# EAGLE board MainBoard 1.5.0 (EAGLE 9.6.2)
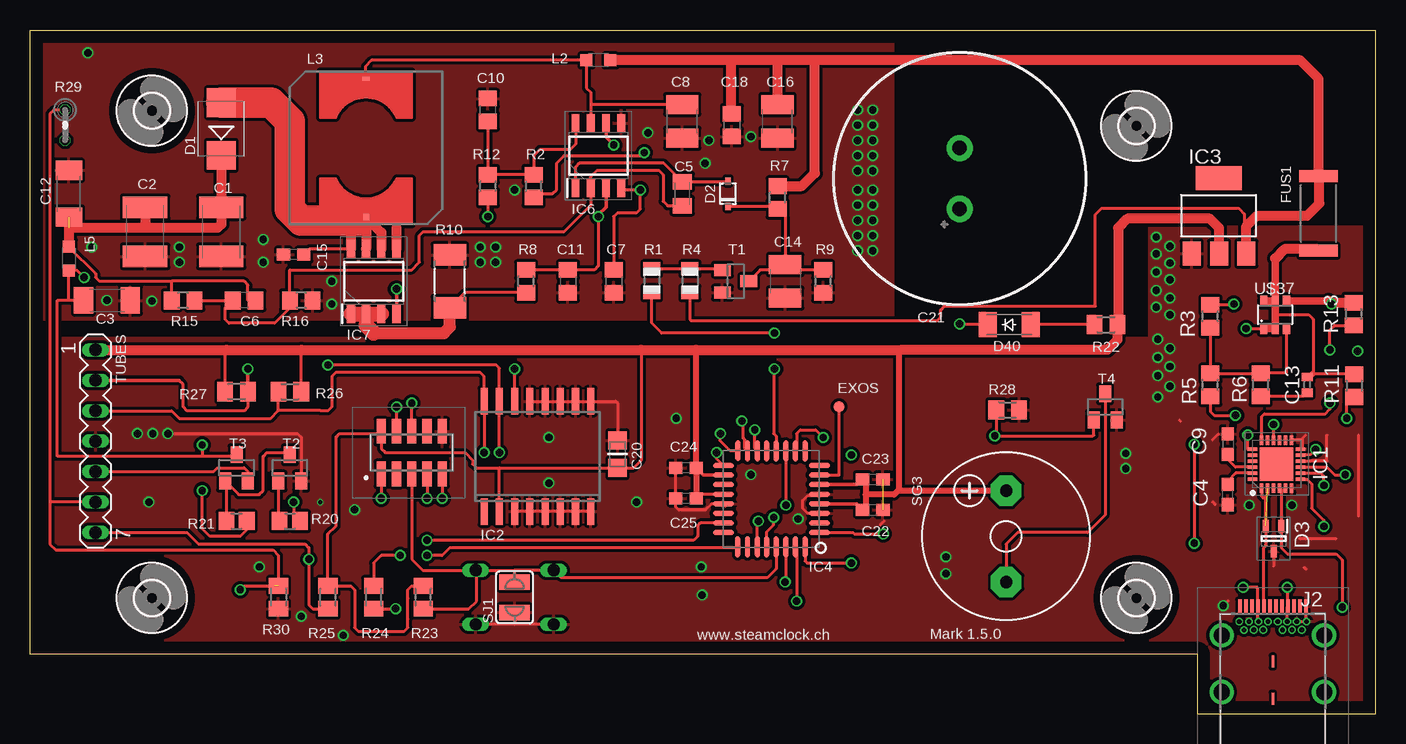
[diagram p0: board, top side]
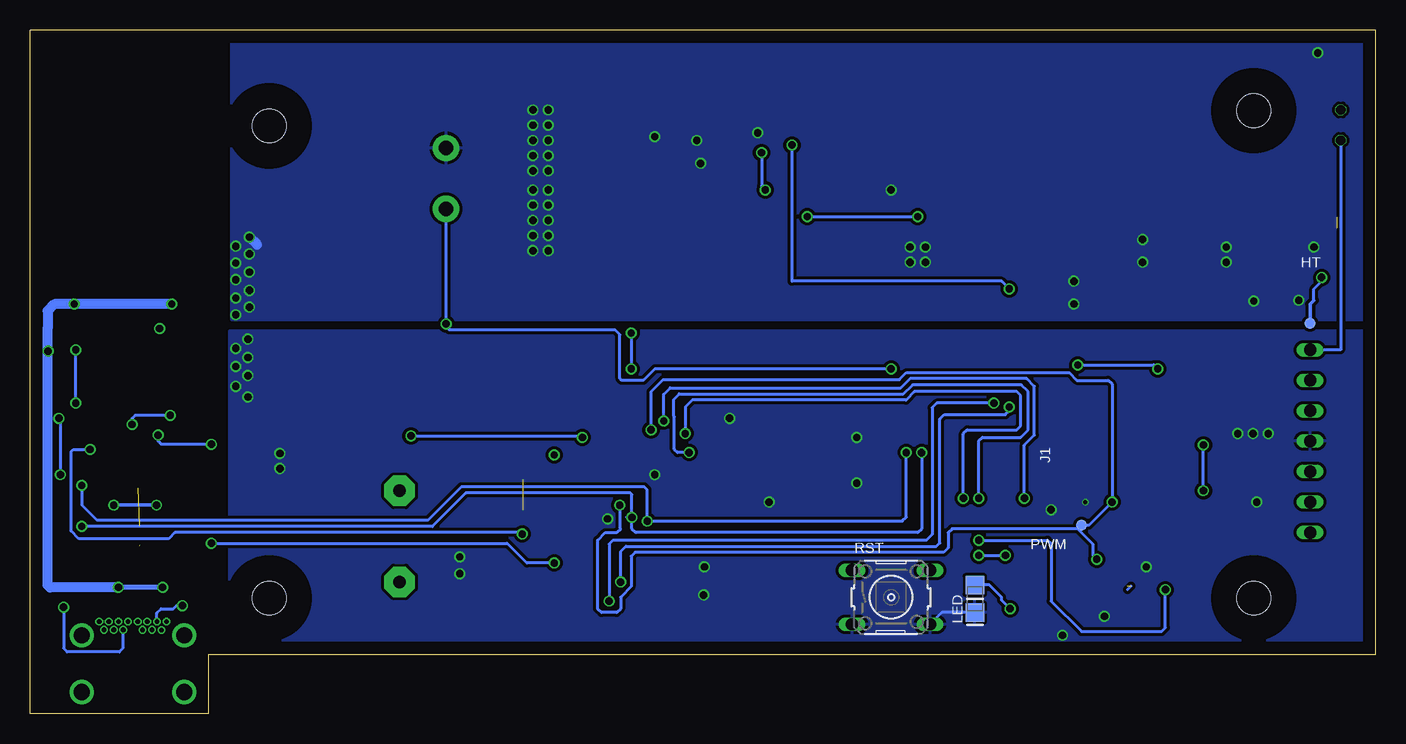
[diagram p1: board, bottom side, seen from below]

Size 112.14 x 57.02 mm. Coordinates in mm from the lower left corner, seen from the top.
Outline: 0,57.02 112.14,57.02 112.14,0 97.28,0 97.28,4.95 0,4.95 0,57.02
Copper layers (1*16): Top 0.035mm / dielectric 1.5mm / Bottom 0.035mm
Design rules "default *": minimum track width 10mil, minimum drill 24mil, track to track 8mil, track to pad 8mil, pad to pad 8mil, via to via 8mil, smd to smd 8mil, copper to edge 40mil, drill to drill 8mil, minimum pad ring 1mil, minimum via ring 3mil, stop-mask expansion 4mil, vias tented up to drill 0mil, thermal gap 10mil
Net classes: 0 default: width 0.254 mm, clearance 0.254 mm; 1 pwr: width 0.254 mm, clearance 0.356 mm

## Footprints (pad centres in the part's own frame; a part is rotated, then mirrored left to right if it is on the bottom)
C1812K = smd 1.8 x 3.7: 1 -2.05,0; 2 2.05,0
C1808 = smd 1.6 x 2.2: 1 -1.95,0; 2 1.95,0
C0603 = smd 1.1 x 1: 1 -0.85,0; 2 0.85,0
C0805K = smd 1.3 x 1.6: 1 -1,0; 2 1,0
C0805 = smd 1.3 x 1.5: 1 -0.95,0; 2 0.95,0
C1210 = smd 1.6 x 2.7: 1 -1.4,0; 2 1.4,0
C0402 = smd 0.7 x 0.9: 1 -0.65,0; 2 0.65,0
CAP0805-NP = smd 1.524 x 1.524: 1 0,0; 2 2.286,0
ELNA21.5X8.0 = drill 1.2 pad 2.184: + -2.54,0; - 2.54,0
SMB = smd 2.4 x 2.4: A 2.2,0; C -2.2,0
SOD323 = smd 0.6 x 0.45: A 1.06,0; C -1.06,0
SOT65P210X110-3N = smd 1.05 x 0.5: 1 -1.05,0.65; 2 -1.05,-0.65; 3 1.05,0
SOD-123_MINI-SMA = smd 1.5 x 2.1: A 1.8,0; C -1.8,0
TP09R = smd 0.9 x 0.9: TP 0,0
R6332 = smd 1 x 3.2: 1 -3.1,0; 2 3.1,0
2,8 = hole 2.8: 0,0
QFN50P400X400X100-25N = smd 0.8 x 0.3: 1 -2,1.25; 2 -2,0.75; 3 -2,0.25; 4 -2,-0.25; 5 -2,-0.75; 6 -2,-1.25; 13 2,-1.25; 14 2,-0.75; 15 2,-0.25; 16 2,0.25; 17 2,0.75; 18 2,1.25 | smd 0.3 x 0.8: 7 -1.25,-2; 8 -0.75,-2; 9 -0.25,-2; 10 0.25,-2; 11 0.75,-2; 12 1.25,-2; 19 1.25,2; 20 0.75,2; 21 0.25,2; 22 -0.25,2; 23 -0.75,2; 24 -1.25,2 | smd 2.8 x 2.8: 25 0,0
SO16W = smd 0.6 x 2.2: 1 -4.445,-4.6; 2 -3.175,-4.6; 3 -1.905,-4.6; 4 -0.635,-4.6; 5 0.635,-4.6; 6 1.905,-4.6; 7 3.175,-4.6; 8 4.445,-4.6; 9 4.445,4.6; 10 3.175,4.6; 11 1.905,4.6; 12 0.635,4.6; 13 -0.635,4.6; 14 -1.905,4.6; 15 -3.175,4.6; 16 -4.445,4.6
SOT223 = smd 1.499 x 2.007: 1 -2.261,-3.15; 2 0.025,-3.15; 3 2.311,-3.15 | smd 3.81 x 2.007: 4 0,3.15
QFP032 = smd 0.432 x 1.778: 1 0,0; 2 0.8,0; 3 1.599,0; 4 2.399,0; 5 3.199,0; 6 3.998,0; 7 4.798,0; 8 5.598,0; 17 5.588,8.001; 18 4.798,7.997; 19 3.998,7.997; 20 3.199,7.997; 21 2.399,7.997; 22 1.599,7.997; 23 0.799,7.997; 24 0,7.997 | smd 1.778 x 0.432: 9 6.807,1.194; 10 6.807,2.007; 11 6.807,2.794; 12 6.807,3.607; 13 6.807,4.394; 14 6.807,5.182; 15 6.807,5.994; 16 6.816,6.803; 25 -1.194,6.807; 26 -1.194,5.994; 27 -1.194,5.182; 28 -1.194,4.394; 29 -1.194,3.607; 30 -1.194,2.794; 31 -1.194,2.007; 32 -1.194,1.194
SOIC127P600X175-8N = smd 1.525 x 0.65: 1 -2.712,1.905; 2 -2.712,0.635; 3 -2.712,-0.635; 4 -2.712,-1.905; 5 2.712,-1.905; 6 2.712,-0.635; 7 2.712,0.635; 8 2.712,1.905
SOIC127P600X175-8N' = smd 1.525 x 0.7: 1 -2.712,1.905; 2 -2.712,0.635; 3 -2.712,-0.635; 4 -2.712,-1.905; 5 2.712,-1.905; 6 2.712,-0.635; 7 2.712,0.635; 8 2.712,1.905
2002132100010C4LF = smd 0.76 x 2.05: 1 2.54,1.775; 2 2.54,-1.775; 3 1.27,1.775; 4 1.27,-1.775; 5 0,1.775; 6 0,-1.775; 7 -1.27,1.775; 8 -1.27,-1.775; 9 -2.54,1.775; 10 -2.54,-1.775
632723300011 = drill 0.4 pad 0.65: 1 2,4.645; B1 2.8,4.645; B2 2.4,3.945; B3 1.6,3.945; B4 1.2,4.645; B5 0.8,3.945; B6 0.4,4.645; B7 -0.4,4.645; B8 -0.8,3.945; B10 -1.6,3.945 | drill 0.381 pad 0.635: 2 -2,4.645; B9 -1.2,4.645; B11 -2.4,3.945 | drill 1.342 pad 2.012: 3 4.27,3.495; 4 -4.27,3.495; 5 4.27,-1.235; 6 -4.27,-1.235 | smd 0.2 x 1: 7 0,1.315; 8 0,-1.785 | smd 0.3 x 1.2: A1 -2.75,5.895; A2 -2.25,5.895; A3 -1.75,5.895; A4 -1.25,5.895; A5 -0.75,5.895; A6 -0.25,5.895; A7 0.25,5.895; A8 0.75,5.895; A9 1.25,5.895; A10 1.75,5.895; A11 2.25,5.895; A12 2.75,5.895 | drill 0.381 pad 0.61: B12 -2.8,4.645
L2012C = smd 1 x 1: 1 -1,0; 2 1,0
MSS7341 = smd 0.61 x 0.305: 1 0,5.765 | smd 0.5 x 0.5: 2 0,-5.765
LED0805 = smd 1.524 x 1.524: 1 0,0; 2 2.286,0
R0805 = smd 1.1 x 1.4: 1 -1,0; 2 1,0
R0805' = smd 1.3 x 1.5: 1 -0.95,0; 2 0.95,0
R2010 = smd 1.8 x 2.7: 1 -2.2,0; 2 2.2,0
R2012 = smd 1.3 x 1.5: 1 -0.85,0; 2 0.85,0
M2012 = smd 1.3 x 1.6: 1 -0.95,0; 2 0.95,0
0204V = drill 0.813 octagon: 1 -1.27,0; 2 1.27,0
B3F-10XX = drill 1.016 long: 1 -3.251,2.261; 2 3.251,2.261; 3 -3.251,-2.261; 4 3.251,-2.261
F/CM12P = drill 1.016 pad 2.54 octagon: + 3.81,0; - -3.81,0
SJW = smd 1.27 x 2.54: 1 -1.27,0; 2 1.27,0
SOT23 = smd 1 x 1.4: 1 -0.95,-1.1; 2 0.95,-1.1; 3 0,1.1
MA07-1 = drill 1.016 long: 1 -7.62,0; 2 -5.08,0; 3 -2.54,0; 4 0,0; 5 2.54,0; 6 5.08,0; 7 7.62,0
SOT23-6 = smd 0.6 x 0.9: 1 -0.95,-1.15; 2 0,-1.15; 3 0.95,-1.15; 4 0.95,1.15; 5 0,1.15; 6 -0.95,1.15

## Placement (x,y rotation side)
C1  1uF  [C1812K]  15.94,40.2 270 top
C2  1uF  [C1812K]  9.59,40.2 270 top
C3  0.1uF  [C1808]  6.41,34.48 0 top
C4  1uF  [C0603]  99.82,18.29 90 top
C5  220pF  [C0805K]  54.36,43.37 270 top
C6  100pF  [C0805]  17.84,34.48 180 top
C7  430pF  [C0805]  48.64,36.07 270 top
C8  100uF  [C1210]  54.36,49.4 90 top
C9  1uF  [C0603]  99.82,22.48 270 top
C10  100nF  [C0805]  38.16,50.36 90 top
C11  1nF  [C0805]  44.83,36.07 270 top
C12  0.1uF  [C1808]  3.24,43.37 90 top
C13  [C0402]  106.43,27.43 90 top
C14  47uF  [C1210]  62.93,36.07 270 top
C15  560pF/250V  [C0603]  21.97,38.29 180 top
C16  100uF  [C1210]  62.29,49.4 90 top
C18  0.1uF  [C0805]  58.48,49.09 270 top
C20  0.1uF  [CAP0805-NP]  48.96,20.51 90 top
C21  [ELNA21.5X8.0]  77.47,44.64 90 top
C22  100n  [C0603]  70.23,17.02 0 top
C23  100nF  [C0603]  70.23,19.56 0 top
C24  100nF  [C0603]  54.67,20.51 180 top
C25  100nF  [C0603]  54.67,17.97 180 top
D1  ES1D  [SMB]  15.94,48.77 90 top
D2  BAT54  [SOD323]  58.17,43.37 90 top
D3  ESDA25W  [SOT65P210X110-3N]  103.63,14.6 270 top
D40  CGRM4001-G  [SOD-123_MINI-SMA]  81.6,32.45 0 top
EXOS  PTR1TP09R  [TP09R]  67.44,25.59 0 top
FUS1  [R6332]  107.38,41.72 90 top
H3  MOUNT-HOLE2.8  [2,8]  10.16,50.29 0 top
H4  MOUNT-HOLE2.8  [2,8]  10.16,9.65 0 top
H5  MOUNT-HOLE2.8  [2,8]  92.2,9.65 0 top
H6  MOUNT-HOLE2.8  [2,8]  92.2,49.02 0 top
HT  PTR1TP09R  [TP09R]  5.46,32.58 0 bottom
IC1  STUSB4500QTR  [QFN50P400X400X100-25N]  103.89,20.83 90 top
IC2  DS3231/SO  [SO16W]  42.29,21.46 0 top
IC3  REG1117  [SOT223]  99.06,41.53 0 top
IC4  ATMEGA328  [QFP032]  65.79,15.11 90 top
IC6  UCC3803DTR  [SOIC127P600X175-8N]  47.37,46.55 90 top
IC7  FDS2672  [SOIC127P600X175-8N']  28.64,36.07 90 top
J1  20021321-00010C4LF  [2002132100010C4LF]  31.81,21.78 180 top
J2  632723300011  [632723300011]  103.57,3.05 0 top
L2  60 Ohms @ 100MHz  [L2012C]  47.37,54.48 180 top
L3  33uH  [MSS7341]  28,47.18 0 top
L5  Ferrite  [L2012C]  3.24,37.97 270 top
LED  Blue  [LED0805]  33.4,8.45 90 bottom
PWM  PTR1TP09R  [TP09R]  24.51,15.75 0 bottom
R1  100k  [R0805]  51.82,36.12 270 top
R2  60k4  [R0805']  41.97,44.01 90 top
R3  [R0805']  98.36,33.15 90 top
R4  100k  [R0805]  54.99,36.12 270 top
R5  [R0805']  98.36,27.43 90 top
R6  [R0805']  102.55,27.43 90 top
R7  2k  [R0805']  62.29,43.05 90 top
R8  1k  [R0805']  41.34,36.07 90 top
R9  100k  [R0805']  66.1,36.07 90 top
R10  0R2  [R2010]  34.99,36.07 90 top
R11  [R0805']  110.36,27.37 270 top
R12  4.12k  [R0805']  38.16,44.01 90 top
R13  [R0805']  110.3,33.34 270 top
R15  634k  [R0805']  12.76,34.48 180 top
R16  7.68k  [R0805']  22.61,34.48 180 top
R20  47k  [R2012]  21.65,16.07 0 top
R21  100k  [R2012]  17.21,16.07 0 top
R22  1k  [M2012]  89.66,32.45 180 top
R23  10k  [M2012]  32.77,9.72 270 top
R24  1k  [M2012]  28.64,9.72 270 top
R25  1k  [M2012]  24.83,9.72 270 top
R26  1k  [M2012]  21.65,26.86 180 top
R27  1k  [M2012]  17.21,26.86 0 top
R28  1k  [M2012]  81.47,25.34 180 top
R29  15k  [0204V]  2.92,49.09 270 top
R30  10k  [M2012]  20.7,9.72 90 top
RST  [B3F-10XX]  40.39,9.72 0 bottom
SG3  F/CM12P  [F/CM12P]  81.34,14.8 90 top
SJ1  [SJW]  40.39,9.72 90 top
T1  MMBTA42  [SOT23]  58.8,36.07 270 top
T2  MMBTA42  [SOT23]  21.65,20.51 0 top
T3  MMBTA42  [SOT23]  17.21,20.51 0 top
T4  BSS123  [SOT23]  89.6,25.59 0 top
TUBES  [MA07-1]  5.46,22.73 270 top
U$37  STT4P3LLH6SOT23_6  [SOT23-6]  103.76,33.27 0 top

## Library data of the parts
C1 C2 = rcl; MOUSER: 810-C4532X7T2E105MST; SPICEPREFIX: C; TDK: C4532X7T2E105M250KE
C3 C12 = rcl; KEMET: CAN17C104KARACTU; MOUSER: 80-CAN17C104KARACTU; SPICEPREFIX: C
C4 = rcl; MOUSER_PART_NUMBER: 81-GRM155R61E105KA2D; SPICEPREFIX: C
C5 C9 C14 C15 C18 C22-C25 = rcl; SPICEPREFIX: C
C6 C7 C10 C11 = rcl; MOUSER: 791-0603X106K100CT; SPICEPREFIX: C
C8 C16 = rcl; MOUSER: 963-EMK325ABJ107MM-P; SPICEPREFIX: C; TAIYO_YUDEN: EMK325ABJ107MM-P
C13 = rcl; MOUSER_PART_NUMBER: 710-885012205050; SPICEPREFIX: C
C20 IC4 LED = MySMD
C21 = Elkos; MOUSER: 555-DB-5R5D474T
D1 = diode
D2 = sp4020_11; MF: Littelfuse; MPN: SP4020-01FTG; OC_FARNELL: unknown; OC_NEWARK: 05X0400
D3 = SamacSys_Parts; DESCRIPTION: STMicroelectronics ESDA25W Dual Uni-Directional TVS Diode Array, 400W peak, 3-Pin SOT-323; HEIGHT: 1.1mm; MANUFACTURER_NAME: STMicroelectronics; MANUFACTURER_PART_NUMBER: ESDA25W; MOUSER_PART_NUMBER: 511-ESDA25W; MOUSER_PRICE-STOCK: https://www.mouser.com/Search/Refine.aspx?Keyword=511-ESDA25W
D40 = diode; MOUSER: 863-NSR0320MW2T1G
EXOS HT PWM = testpad
FUS1 = rcl; MOUSER: 530-0ZCG0150AF2C; SPICEPREFIX: R
H3-H6 = holes
IC1 = SamacSys_Parts; DESCRIPTION: USB Interface IC CONDITIONING & INTERFACES; HEIGHT: 1mm; MANUFACTURER_NAME: STMicroelectronics; MANUFACTURER_PART_NUMBER: STUSB4500QTR; MOUSER_PART_NUMBER: 511-STUSB4500QTR; MOUSER_PRICE-STOCK: https://www.mouser.com/Search/Refine.aspx?Keyword=511-STUSB4500QTR
IC2 = DS3231; AVAILABILITY: Unavailable; MF: Maxim Integrated; MP: DS3231; PACKAGE: SOIC-16 Maxim Integrated; PRICE: None
IC3 = burr-brown; MPN: REG1117; OC_FARNELL: 1097566; OC_NEWARK: 14P6981
IC6 = UCC3803DTR; DESCRIPTION: Switching Controllers Low-Power BiCMOS Current-Mode PWM; HEIGHT: 1.75mm; MANUFACTURER_NAME: Texas Instruments; MANUFACTURER_PART_NUMBER: UCC3803DTR; MOUSER_PART_NUMBER: 595-UCC3803DTR; MOUSER_PRICE-STOCK: https://www.mouser.com/Search/Refine.aspx?Keyword=595-UCC3803DTR
IC7 = FDS2672; DESCRIPTION: FDS2672, N-channel MOSFET Transistor 3.9 A 200 V, 8-Pin SOIC; HEIGHT: 1.75mm; MANUFACTURER_NAME: Fairchild Semiconductor; MANUFACTURER_PART_NUMBER: FDS2672; MOUSER_PART_NUMBER: 512-FDS2672; MOUSER_PRICE-STOCK: https://www.mouser.com/Search/Refine.aspx?Keyword=512-FDS2672; RS_PART_NUMBER: 6710481P; RS_PRICE-STOCK: http://uk.rs-online.com/web/p/products/6710481P
J1 = SamacSys_Parts; DESCRIPTION: Headers & Wire Housings 1.27x1.27mm BTB, Hdr Recept, SMT, 10 Pos; HEIGHT: 4.75mm; MANUFACTURER_NAME: Amphenol; MANUFACTURER_PART_NUMBER: 20021321-00010C4LF; MOUSER_PART_NUMBER: 649-202132100010C4LF; MOUSER_PRICE-STOCK: https://www.mouser.com/Search/Refine.aspx?Keyword=649-202132100010C4LF
J2 = SamacSys_Parts; DESCRIPTION: USB Connectors WR-COM USB3.1 Type C SuperSpeed+ Rcpt; HEIGHT: 2mm; MANUFACTURER_NAME: Wurth Elektronik; MANUFACTURER_PART_NUMBER: 632723300011; MOUSER_PART_NUMBER: 710-632723300011; MOUSER_PRICE-STOCK: https://www.mouser.com/Search/Refine.aspx?Keyword=710-632723300011
L2 L5 = rcl; SPICEPREFIX: L
L3 = STEAM-inductor-coilcraft; MOUSER: 710-784770330
R1 R4 R10 R20-R28 = adafruit
R2 R3 R5 R6 R8 R9 R11 R13 = rcl; SPICEPREFIX: R
R7 = rcl; MOUSER: 754-RR1220P-202D; SPICEPREFIX: R; SUSUMU: RR1220P-202-D
R12 = rcl; KOASPEER: RN732ATTD4121F100; MOUSER: 660-RN732ATD4121F100; SPICEPREFIX: R
R15 = rcl; MOUSER: 71-CRCW0603-634K-E3; SPICEPREFIX: R; VISHAY: CRCW0603634KFKEA
R16 = rcl; MOUSER: 71-CRCW0805-7.68K-E3; SPICEPREFIX: R; VISHAY: CRCW08057K68FKEA
R29 R30 = resistor
RST = switch-omron; MPN: B3F-1000; OC_FARNELL: 176432; OC_NEWARK: 36M3542
SG3 = buzzer; OC_FARNELL: unknown; OC_NEWARK: unknown
SJ1 = jumper
T1-T3 = transistor
T4 = transistor-small-signal
TUBES = con-lstb; OC_FARNELL: unknown; OC_NEWARK: unknown
U$37 = STT4P3LLH6; AVAILABILITY: Unavailable; DESCRIPTION: P-Channel 30 V, 0.048 Ohm typ., 4 A STripFET H6 Power MOSFET in a SOT23-6L package; MF: STMicroelectronics; MP: STT4P3LLH6; PACKAGE: SOT-23-6 STMicroelectronics; PRICE: None

## Nets
+5V [pwr]: C20.1 C22.1 C23.1 C24.1 C25.1 IC2.2 IC3.2 IC4.4 IC4.6 IC4.18 IC4.20 J1.2 R22.1 R23.1 R25.1 R26.1 R27.1 R29.2 SG3.+ TUBES.1
ALERT: IC1.19 IC4.32
ATTACH: IC1.11 IC4.1
BATT: C21.+ D40.C IC2.14
BUZ: IC4.10 R28.2 T4.1
CC1: D3.2 IC1.1 IC1.2 J2.A5
CC2: D3.1 IC1.4 IC1.5 J2.B5
COM: C1.2 C2.2 C3.2 C4.1 C7.2 C8.1 C9.1 C10.2 C11.2 C12.2 C14.2 C15.2 C16.1 C18.2 C20.2 C21.- C22.2 C23.2 C24.2 C25.2 D3.3 IC1.6 IC1.10 IC1.12 IC1.13 IC2.3 IC2.4 IC2.5 IC2.6 IC2.7 IC2.8 IC2.9 IC2.10 IC2.11 IC2.12 IC2.13 IC3.1 IC4.3 IC4.5 IC4.21 IC6.5 J1.10 J2.1 J2.2 J2.A12 J2.B1 LED.1 R9.1 R10.2 R16.1 R28.1 R30.1 RST.3 RST.4 SJ1.1 T1.2 T2.2 T4.2 TUBES.4
CS: C11.1 IC6.3 R8.2 R12.1
FB: C5.2 C6.2 IC6.2 R15.1 R16.2
HT: T3.2 TUBES.5
HT-ENABLE: IC4.12 R1.2
IRQ: IC4.11 R25.2 TUBES.7
LDR: IC4.23 R29.1 R30.2 TUBES.6
LED: IC4.25 R24.1
MISO: IC4.16 J1.9
MOSI: IC4.15 J1.1
N$1: C4.2 IC1.23
N$2: C9.2 IC1.22
N$3: SG3.- T4.3
N$5: EXOS.TP IC4.7
N$6: C1.1 C2.1 C6.1 C12.1 D1.C L5.1 R15.2
N$7: R21.1 T2.3 T3.1
N$8: R1.1 R4.1 T1.1
N$9: C14.1 D2.C R7.1 R9.2 T1.3
N$10: C5.1 D2.A IC6.1
N$11: R3.1 R5.2 R6.2 U$37.3
N$12: IC7.1 IC7.2 IC7.3 R8.1 R10.1
N$13: C13.1 R6.1
N$14: C8.2 IC6.7 L2.2 L3.1
N$15: LED.2 R24.2
N$17: IC1.16 R5.1
N$18: C15.1 D1.A IC7.5 IC7.6 IC7.7 IC7.8 L3.2
N$19: R20.1 T2.1
N$21: IC1.9 R11.2
N$22: IC1.18 R13.2
N$23: D40.A R22.2
OUT: IC6.6 IC7.4
POSTFUSE [pwr]: C16.2 C18.1 FUS1.2 IC3.3 L2.1 R4.2 R7.2
PWM: IC4.14 PWM.TP R20.2
RAW_HT: C3.1 HT.TP L5.2 R21.2 T3.3
RC: C7.1 IC6.4 R2.1
REF: C10.1 IC6.8 R2.2 R12.2
RESET: IC4.29 J1.5 R23.2 RST.1 RST.2 SJ1.2
RX: IC4.30 J1.4
SCK: IC4.17 J1.7
SCL: IC1.7 IC2.16 IC4.28 R26.2 TUBES.3
SDA: IC1.8 IC2.15 IC4.27 R27.2 TUBES.2
TX: IC4.31 J1.6
VBUS: J2.A4 J2.A9 J2.B4 J2.B9 R3.2 R13.1 U$37.4
VCC [pwr]: C13.2 FUS1.1 R11.1 U$37.1 U$37.2 U$37.5 U$37.6

## Tracks (layer width: path | path; a pad name or v marks a point on that pad's centre or on a via)
+5V
  Top 0.254: 55.52,18.07 C25.1 55.86,18.31 IC4.20 | 39.12,20.51 37.21,20.51 36.89,20.83 36.89,21.15 36.26,21.78 29.59,21.78 29.27,22.1 29.27,23.37 | 39.12,20.51 C20.1 50.29,20.51 50.93,21.15 50.93,30.35 | J1.2 29.27,23.37 | IC2.2 39.12,20.51 | 29.27,23.37 25.78,23.37 25.5,23.09 25.5,15.65 24.83,14.98 R25.1 26.74,10.66 27.05,10.35 27.05,7.17 27.37,6.86 31.18,6.86 31.5,7.17 31.5,7.9 31.48,7.92 31.48,9.62 31.5,9.63 31.5,10.35 31.81,10.66 R23.1 | SG3.+ 81.25,18.51 | 99.09,40.26 99.09,40.51 | 22.61,30.35 22.6,30.35 R26.1 | 16.38,30.35 16.26,30.23 R27.1 | 55.52,30.33 55.5,30.35 | C23.1 69.64,19.3 | 72.64,30.35 72.39,30.1 | 72.45,18.61 72.39,18.67
  Top 0.305: IC4.4 68.89,17.51 C22.1 69.64,17.27 | IC4.6 68.93,19.11 C23.1 | IC4.18 56.12,19.91 C24.1
  Top 0.508: C25.1 C24.1 55.52,30.33 | 69.64,18.29 69.64,17.27 | 69.64,19.3 69.64,18.29 | 72.39,30.1 72.39,18.67 72.01,18.29 69.64,18.29 | SG3.+ 72.45,18.61
  Top 0.813: IC3.2 99.09,40.26 | 99.09,40.51 98.32,41.27 91.44,41.27 90.68,40.51 90.68,32.51 R22.1 90.61,31.18 89.79,30.35 72.64,30.35 55.5,30.35 50.93,30.35 22.61,30.35 16.38,30.35 TUBES.1
  Bottom 0.254: R29.2 2.92,30.35 TUBES.1
ALERT  (via drill 0.61)
  Top 0.254: IC4.32 64.59,12.75 64.77,12.57 v68.45,12.57 | IC1.19 101.47,22.08 v101.47,23.24 | v97.03,22.48 v97.03,14.22
  Bottom 0.254: v68.45,12.57 70.74,12.57 72.39,14.22 v97.03,14.22 | v97.03,22.48 101.22,22.48 101.47,22.73 v101.47,23.24
ATTACH  (via drill 0.61)
  Top 0.254: IC4.1 68.58,15.11 68.71,14.99 v71.12,14.99 | v107.13,22.04 106.68,21.59 IC1.11
  Bottom 0.254: v107.13,22.04 108.53,22.04 108.71,21.86 108.71,15.24 108.08,14.6 100.58,14.6 100.08,15.11 71.25,15.11 v71.12,14.99
BATT  (via drill 0.61)
  Top 0.254: IC2.14 v40.39,28.77 | D40.C 77.47,32.45 v77.47,32.51
  Bottom 0.254: v40.39,28.77 60.07,28.77 61.02,27.81 62.87,27.81 62.99,27.94 62.99,31.62 63.37,32 77.22,32 77.47,32.26 v77.47,32.51 C21.+
BUZ  (via drill 0.61)
  Top 0.254: IC4.10 63.88,22.02 63.88,23.37 64.2,23.69 65.47,23.69 v66.1,23.05 | T4.1 88.65,23.24 88.58,23.18 v80.39,23.18 80.52,23.31 R28.2
  Bottom 0.254: v80.39,23.18 66.23,23.18 v66.1,23.05
CC1  (2 unrouted)
  Top 0.254: J2.A5 102.82,13.84 102.98,14.01 | IC1.2 103.14,18.29 102.82,17.97 102.64,18.15 IC1.1 | 102.95,14.1 102.98,14.06 D3.2 | D3.2 102.98,18.13 103.11,18.26 103.11,18.29 102.98,18.17 D3.2
CC2  (via drill 0.61)
  Top 0.254: IC1.4 104.28,18.68 104.28,18.47 | 104.28,18.47 D3.1 104.28,13.83 104.78,13.33 108.84,13.33 109.35,12.83 v109.35,8.89 | IC1.5 104.28,18.47
  Bottom 0.254: J2.B5 104.39,6.97 104.39,5.46 104.7,5.16 109.04,5.16 109.35,5.46 v109.35,8.89
COM  (via drill 0.35, 0.61)  (1 unrouted)
  Top 0.254: IC4.3 64.82,16.71 64.41,17.12 64.41,17.8 64.82,18.21 65.69,18.21 IC4.5 | IC2.8 IC2.7 IC2.6 IC2.5 IC2.4 IC2.3 | 57.97,17.34 IC4.21 56.8,17.51 56.27,16.99 54.07,16.99 53.82,17.23 C25.2 C24.2 | 70.87,15.75 71.18,16.07 | 71.18,16.92 C22.2 | IC2.13 IC2.12 IC2.11 IC2.10 IC2.9 48.8,26.06 48.96,25.91 C20.2 | v11.49,23.37 22.29,23.37 22.61,23.05 T2.2 | RST.3 40.39,7.46 | 40.39,7.46 RST.4 | SJ1.1 40.39,7.46 | J2.1 105.67,7.69 105.68,7.7 106.26,7.7 106.27,7.69 J2.B1 106.35,7.71 106.35,8.94 | 106.32,12.05 106.17,12.19 | D3.3 103.63,12.32 | v99.44,9.02 99.82,9.4 | IC1.6 105.16,18.81 | IC1.10 106.68,21.08 108.08,21.08 108.08,23.24 | 110.7,23.24 110.7,16.47 | 108.84,14.6 105.79,14.6 | IC1.13 105.17,22.86 106.05,22.86 | 98.77,17.44 98.55,17.65 | 98.55,22.86 99.02,23.33 | IC1.12 106.05,22.24 106.05,22.86 | 106.05,22.86 106.05,22.99 106.3,23.24 | 99.66,23.5 C9.1 | R28.1 82.55,25.47 | 95.78,24.49 95.89,24.38
  Top 0.305: 101.43,17.44 101.47,17.4 v101.6,17.4
  Bottom 0.254: LED.1 36.14,8.45 RST.4 | J2.2 101.57,8.41 101.22,8.76 100.2,8.76 99.95,9.02 v99.44,9.02
  Bottom 0.305: v101.6,17.4 v105.16,17.4
  Bottom 0.813: v93.85,39.75 93.22,39.12
  other vias: 8.95,23.37 10.22,23.37 19.11,12.26 22.61,8.13 26.1,6.54 9.91,17.65 4.83,55.12 19.43,37.66 12.45,37.66 6.41,34.48 5.14,38.93 12.45,38.93 19.43,39.56 37.53,38.93 37.53,37.66 38.8,37.66 38.8,38.93 25.15,36.07 25.15,34.16 70.23,38.61 70.23,39.88 70.23,41.15 70.23,42.42 70.23,43.69 70.23,45.28 70.23,46.55 70.23,47.82 70.23,49.09 70.23,50.36 68.96,38.61 68.96,39.88 68.96,41.15 68.96,42.42 68.96,43.69 68.96,45.28 68.96,46.55 68.96,47.82 68.96,49.09 68.96,50.36 43.24,23.05 43.24,19.24 50.55,17.65 55.94,12.26 51.5,48.45 56.58,47.82 56.26,45.91 60.07,48.13 40.39,43.69 27.05,17.02 24.19,17.65 95,34.67 95,38.99 95,36.2 95,37.59 95,33.27 93.85,38.35 93.85,36.83 93.85,35.31 93.85,33.91 76.33,13.08 76.33,11.68 91.31,21.72 91.31,20.45 56.01,9.91 60.07,19.94 64.01,16.26 53.85,24.64 10.16,34.42 93.98,31.24 95,30.48 93.98,29.72 95,28.96 93.98,28.19 95,27.31 93.98,26.42
  pour Top: 0.38,56.07 71.88,56.07 71.88,32.89 0.38,32.89
  pour Bottom: -2.16,31.94 -2.16,2.1 95.5,2.1 95.5,31.94
  pour Top: -1.84,31.31 -1.84,4.95 93.47,4.95 93.47,31.31
  pour Bottom: 95.38,56.07 95.38,32.89 0.38,32.89 0.38,56.07
  pour Top: 93.28,40.58 93.28,-1.78 111.25,-1.78 111.25,40.58
CS  (via drill 0.61)
  Top 0.254: R12.1 v38.16,41.47 | v47.37,41.47 47.37,37.34 47.05,37.02 C11.1 R8.2
  Top 0.305: IC6.3 48.01,42.25 47.37,41.61 v47.37,41.47
  Bottom 0.254: v47.37,41.47 v38.16,41.47
FB
  Top 0.254: C5.2 53.13,42.37 52.77,42.74 52.77,44.96 52.45,45.27 47.22,45.27 46.74,44.79 IC6.2 46.74,42.42 44.51,40.2 32.77,40.2 32.45,39.88 32.45,37.66 31.81,37.02 21.66,37.02 R16.2 21.66,33.85 20.38,32.58 16.57,32.58 16.26,32.89 16.26,33.84 C6.2 R15.1
HT
  Top 0.254: TUBES.5 15.3,20.19 15.6,20.49 17.82,20.49 17.84,20.51 18.16,20.2 T3.2
HT-ENABLE  (via drill 0.61)
  Top 0.254: IC4.12 62.18,23.15 61.97,23.36 61.98,23.37 61.98,28.7 v62.04,28.77 | v62.04,31.75 52.64,31.75 51.82,32.58 R1.2
  Bottom 0.254: v62.04,31.75 v62.04,28.77
IRQ  (via drill 0.61)
  Top 0.254: 62.93,21.98 IC4.11 v62.99,17.4 | R25.2 23.56,8.76 23.24,9.08 v23.24,12.89 23.24,13.84 22.92,14.16 14.03,14.16 13.08,15.11 TUBES.7
  Bottom 0.254: v23.24,12.89 23.56,13.21 23.56,14.16 24.83,15.43 35.31,15.43 35.62,15.11 35.62,13.84 36,13.46 61.72,13.46 62.04,13.14 62.04,10.62 62.93,9.73 62.93,8.76 63.25,8.45 64.52,8.45 64.83,8.76 64.83,14.48 64.2,15.11 63.25,15.11 62.93,15.43 62.99,15.49 v62.99,17.4
LDR  (via drill 0.61)  (1 unrouted)
  Top 0.254: IC4.23 55.87,15.91 55.63,15.67 55.63,14.79 55.31,14.48 v33.08,14.48 | R30.2 20.7,13.21 20.26,13.65 2.15,13.65 1.65,14.15 1.65,17.65 | 21.02,10.35 R30.2 | R29.1 1.97,50.36 1.65,50.04 1.65,17.65 | TUBES.6 1.65,17.65 | v17.53,10.35 17.84,10.66 R30.2
  Bottom 0.254: 20.38,10.67 20.7,10.35 | v17.53,10.35 17.53,7.17 17.84,6.86 24.51,6.86 27.05,9.4 27.05,14.16 27.37,14.48 v33.08,14.48
LED  (via drill 0.61)
  Top 0.254: IC4.25 58.9,13.84 34.99,13.84 34.35,13.21 v33.08,13.21 | v30.86,13.21 29.27,13.21 28.64,12.57 R24.1
  Bottom 0.254: v33.08,13.21 v30.86,13.21
MISO  (via drill 0.61)
  Top 0.254: J1.9 v34.35,17.97 | IC4.16 58.34,21.93 57.53,22.73 v57.53,23.37
  Bottom 0.254: v34.35,17.97 34.35,23.37 34.04,23.69 29.91,23.69 29.59,24 29.59,26.54 29.91,26.86 38.44,26.86 39.14,26.16 56.96,26.16 57.53,25.59 v57.53,23.37
MOSI  (via drill 0.61)
  Top 0.254: J1.1 v29.27,17.97 | IC4.15 59.58,22.13 59.58,22.85 59.44,22.99 59.44,24.32 v59.33,24.43
  Bottom 0.254: v29.27,17.97 29.27,22.42 28.45,23.24 28.45,27.31 29.08,27.94 38.8,27.94 39.56,27.18 58.8,27.18 59.33,26.65 v59.33,24.43
N$1
  Top 0.254: C4.2 99.82,19.4 100.48,20.08 IC1.23
N$2
  Top 0.254: IC1.22 100.45,20.58 99.82,21.21 C9.2
N$3
  Top 0.254: SG3.- 81.34,14.16 82.3,15.11 88.14,15.11 89.6,16.57 T4.3
N$5
  Top 0.254: IC4.7 67.44,19.91 EXOS.TP
N$6  (1 unrouted)
  Top 0.254: C6.1 18.16,34.48 18.16,35.75 17.84,36.07 11.81,36.07 | R15.2 11.81,36.07 | L5.1 3.24,38.93 5.46,36.7 5.46,36.38 5.78,36.07 11.81,36.07
  Top 0.813: D1.C C1.1 15.94,40.83 15.62,40.51 9.59,40.51 | 9.59,40.51 3.24,40.51 | C2.1 9.59,40.51 | C12.1 L5.1
N$7
  Top 0.254: T2.3 21.48,21.78 19.75,21.78 19.43,21.46 19.43,18.61 19.11,18.29 17.38,18.29 T3.1 16.36,19.31 R21.1
N$8
  Top 0.254: T1.1 57.6,37.12 R4.1 R1.1
N$9
  Top 0.254: D2.C 62.09,42.31 R7.1 62.93,41.47 C14.1 63.38,37.02 R9.2 60.85,37.02 T1.3
N$10
  Top 0.254: IC6.1 45.47,45.59 45.78,45.91 52.82,45.91 C5.1 58.11,44.37 D2.A
N$11
  Top 0.254: R3.1 R5.2 R6.2 102.62,28.45 104.71,28.45 U$37.3
N$12
  Top 0.254: R8.1 36.24,35.12 R10.1
  Top 1.016: 28.64,31.75 34.48,31.75 34.99,32.26 R10.1
  Top 1.27: IC7.1 IC7.2 | IC7.2 IC7.3 | 28.64,31.75 28,32.38 IC7.2
N$13
  Top 0.254: R6.1 106.13,26.48 C13.1
N$14
  Top 0.254: 46.74,50.8 46.74,51.82 46.37,52.18 L2.2 28.45,54.48 27.94,53.98 27.94,53.01 L3.1 | 46.74,50.8 IC6.7 | C8.2 46.74,50.8
N$15  (via drill 0.61)
  Top 0.254: R24.2 v30.47,8.76
  Bottom 0.254: v30.47,8.76 31.18,9.47 31.18,9.72 32.2,10.73 LED.2
N$17  (via drill 0.61)
  Top 0.254: R5.1 98.36,25.21 98.68,24.89 v100.46,24.89 | IC1.16 v103.64,24.13 v103.63,24.13
  Bottom 0.254: v103.63,24.13 103.63,24.64 103.38,24.89 v100.46,24.89
N$18
  Top 0.254: C15.1 23.31,38.78 IC7.8 | 28.05,41.78 28,41.74 L3.2 | L3.2 27.74,41.15 27.37,41.15 28,40.51 | L3.2 27.1,40.51 26.73,40.51 | L3.2 28.37,41.78 29.27,41.78 30.54,40.51
  Top 0.813: 29.27,41.78 29.59,42.1 29.59,41.47 | 28,40.51 IC7.7 | L3.2 29.27,40.15 IC7.6 | IC7.5 30.54,40.51 | 26.73,40.51 IC7.8
  Top 1.27: 28.05,40.91 28.05,41.78
  Top 2.54: D1.A 20.09,50.97 21.65,49.4 21.65,42.1 22.61,41.15 27.37,41.15
N$19
  Top 0.254: R20.1 20.7,16.17 T2.1
N$21  (via drill 0.61)
  Top 0.254: IC1.9 108.07,20.58 108.71,19.94 v109.6,19.94 | v109.73,24.64 109.73,25.78 R11.2
  Bottom 0.254: v109.6,19.94 109.6,24.51 v109.73,24.64
N$22  (via drill 0.61)
  Top 0.254: 102.62,22.85 IC1.18 102.64,24.79 102.87,25.02 107.95,25.02 108.33,25.4 v108.33,25.91 | v108.33,30.35 108.33,32 108.71,32.39 R13.2
  Bottom 0.254: v108.33,25.91 v108.33,30.35
N$23
  Top 0.254: R22.2 D40.A
N$25  (via drill 0.61)
  other vias: 68.45,21.59
OUT  (via drill 0.61)
  Top 0.254: 30.54,35.12 v30.54,35.43
  Top 0.305: IC7.4 30.54,35.12 | IC6.6 48.01,48.07 v48.64,47.43
  Bottom 0.254: v30.54,35.43 31.18,36.07 48.64,36.07 v48.64,47.43
POSTFUSE
  Top 0.254: 107.44,44.88 FUS1.2 | R7.2 62.36,44.07 | R4.2 54.99,32.89 55.12,32.77 75.56,32.77 75.9,33.1 75.9,33.68 76.2,33.98 88.77,33.98 88.77,41.64 89.29,42.16 100.72,42.16 101.21,41.68 101.21,38.54 IC3.3
  Top 0.813: FUS1.2 107.38,52.96 105.85,54.48 65.41,54.48 | IC3.3 101.37,40.66 102.23,41.53 106.43,41.53 107.44,42.55 107.44,44.88 | 65.41,54.48 62.36,54.48 | 62.36,54.48 58.42,54.48 | 58.42,54.48 L2.1 | C18.1 58.42,50.1 58.42,54.48 | C16.2 62.29,54.42 62.36,54.48 | R7.2 64.32,44 65.41,45.09 65.41,54.48
PWM  (via drill 0.61)
  Top 0.254: v60.39,23.69 60.39,22.14 IC4.14 | R20.2 21.97,16.6 v21.97,17.65
  Bottom 0.254: PWM.TP 23.88,15.75 v21.97,17.65 21.97,27.5 22.29,27.81 24.89,27.81 25.53,28.45 39.12,28.45 39.69,27.88 59.37,27.88 60.39,26.86 v60.39,23.69
RAW_HT  (via drill 0.61)
  Top 0.254: T3.3 17.06,21.46 14.35,21.46 | 14.35,21.46 2.29,21.46 2.29,34.48 3.24,34.48 | 3.24,34.48 L5.2 3.92,36.97 v4.51,36.38 | C3.1 3.24,34.48 | R21.2 18.06,15.33 17.53,14.79 14.99,14.79 14.35,15.43 v14.35,18.61 | v14.35,22.42 14.35,21.46
  Bottom 0.254: v14.35,18.61 v14.35,22.42 | 5.14,34.48 5.14,35.43 4.51,36.07 v4.51,36.38
  Bottom 0.305: 5.14,34.48 5.46,34.16 HT.TP
RC  (via drill 0.61)
  Top 0.254: IC6.4 49.28,43.69 v50.86,43.69 50.86,42.1 50.55,41.78 48.96,41.78 48.64,41.47 C7.1 | R2.1 42.29,43.37 43.56,43.37 43.88,43.69 43.88,45.91 44.51,46.55 51.18,46.55 v51.18,46.8
  Bottom 0.254: v51.18,46.8 51.18,44.01 v50.86,43.69
REF
  Top 0.254: C10.1 R12.2 R2.2 41.97,46.54 42.48,47.05 45.02,47.05 45.47,47.5 IC6.8
RESET
  Top 0.254: RST.2 40.39,11.98 | SJ1.2 40.39,11.98 | 40.39,11.98 RST.1 44.27,11.34 61.42,11.34 62.18,12.1 IC4.29 | R23.2 36.58,8.77 37.21,9.4 37.21,11.9 RST.2 | J1.5 31.81,12.89 32.73,11.98 RST.2
RX  (via drill 0.61)
  Top 0.254: J1.4 v30.54,25.59 | IC4.30 62.99,11.05 v62.93,10.99
  Bottom 0.254: v62.93,10.99 62.93,13.53 62.48,13.97 36.6,13.97 36.32,14.25 36.32,24.57 35.94,24.96 30.86,24.96 30.54,25.27 v30.54,25.59
SCK  (via drill 0.61)
  Top 0.254: J1.7 v33.08,17.97 | IC4.17 57.21,21.27 v57.21,21.78
  Bottom 0.254: v33.08,17.97 33.08,22.73 32.77,23.05 29.59,23.05 28.96,23.69 28.96,26.86 29.53,27.43 38.59,27.43 39.35,26.67 58.04,26.67 58.48,26.23 58.48,24.83 58.44,24.79 58.44,22.06 58.17,21.78 v57.21,21.78
SCL  (via drill 0.61)
  Top 0.254: TUBES.3 11.81,25.27 12.45,24.64 20.07,24.64 20.7,25.28 | 20.7,25.28 R26.2 | IC4.28 61.39,15.16 61.98,15.75 v61.98,16.38 | v37.85,21.78 IC2.16 37.85,28.13 37.53,28.45 25.46,28.45 25.15,28.13 25.15,25.59 24.83,25.27 24.19,25.27 24.19,25.28 20.7,25.28 | IC1.7 105.91,19.56 106.43,19.56 106.81,19.18 106.81,17.15 107.82,16.13 v107.82,15.62
  Bottom 0.254: v37.85,21.78 37.85,15.43 38.16,15.11 61.66,15.11 61.98,15.43 v61.98,16.38 | v61.98,16.38 62.42,16.38 | v61.98,16.38 61.98,18.29 62.1,18.42 75.82,18.42 78.61,15.62 v107.82,15.62
SDA  (via drill 0.61)
  Top 0.254: R27.2 18.16,25.59 17.84,25.27 13.08,25.27 12.76,25.59 12.76,27.5 12.45,27.81 | IC4.27 60.6,15.96 v60.71,16.07 | v39.12,21.78 IC2.15 39.12,28.83 38.86,29.08 v24.83,29.08 | v107.82,19.05 107.82,19.81 107.56,20.08 IC1.8
  Top 0.305: R27.2 v18.16,28.76 v18.16,28.77 | 12.45,27.81 TUBES.2
  Bottom 0.254: v39.12,21.78 39.12,16.38 39.43,16.07 v60.71,16.07 60.71,18.67 60.96,18.92 76.2,18.92 78.99,16.13 106.55,16.13 107.82,17.4 v107.82,19.05 | v24.83,29.08 18.48,29.08
  Bottom 0.305: v18.16,28.77 18.48,29.08
TX  (via drill 0.61)
  Top 0.254: J1.6 v31.81,25.91 | IC4.31 63.88,13.82 v63.88,9.4
  Bottom 0.254: v31.81,25.91 36.58,25.91 36.96,25.53 36.96,14.97 37.45,14.48 63.56,14.48 63.88,14.16 v63.88,9.4
VBUS  (via drill 0.61)
  Top 0.254: J2.B4 104.77,8.89 J2.A9 104.82,10.54 v104.78,10.54 | J2.B9 102.32,7.74 J2.A4 102.3,8.96 102.3,10.54 v101.09,10.54 | v100.33,34.16 100.26,34.1 R3.2
  Top 0.61: U$37.4 108.2,34.42
  Top 0.813: 108.2,34.42 v108.46,34.16 108.58,34.29 R13.1
  Bottom 0.254: 110.68,32.13 110.68,30.28 v110.63,30.24
  Bottom 0.406: v101.09,10.54 v104.78,10.54
  Bottom 0.813: v104.78,10.54 110.47,10.54 110.68,10.75 110.68,32.13 110.68,33.6 110.11,34.16 v108.46,34.16 v100.33,34.16
VCC  (via drill 0.61)
  Top 0.254: R11.1 107.04,28.32 106.93,28.2 106.93,28.58 | 106.93,28.58 C13.2 | 103.76,33.27 106.55,33.27 106.93,32.9 106.93,28.58 | v101.35,32.13 U$37.1 | FUS1.1 107.26,38.73
  Top 0.61: U$37.6 U$37.5 | U$37.5 103.76,33.27 U$37.2 U$37.1 | U$37.5 103.76,37.97
  Top 0.813: 103.76,37.97 104.52,38.73 107.26,38.73

## Text on the board
tNames: www.steamclock.ch | Mark 1.5.0